# Altium PCB Power_supply_ver5.0.1.PcbDoc
Units mm, origin at the board's own origin, x right, y up, seen from the top; angles counter-clockwise.
Board outline 94.86 x 64.25 mm, 2 copper layers (Top Layer, Bottom Layer); 104 components, 45 nets, 301 pads, 37 vias.
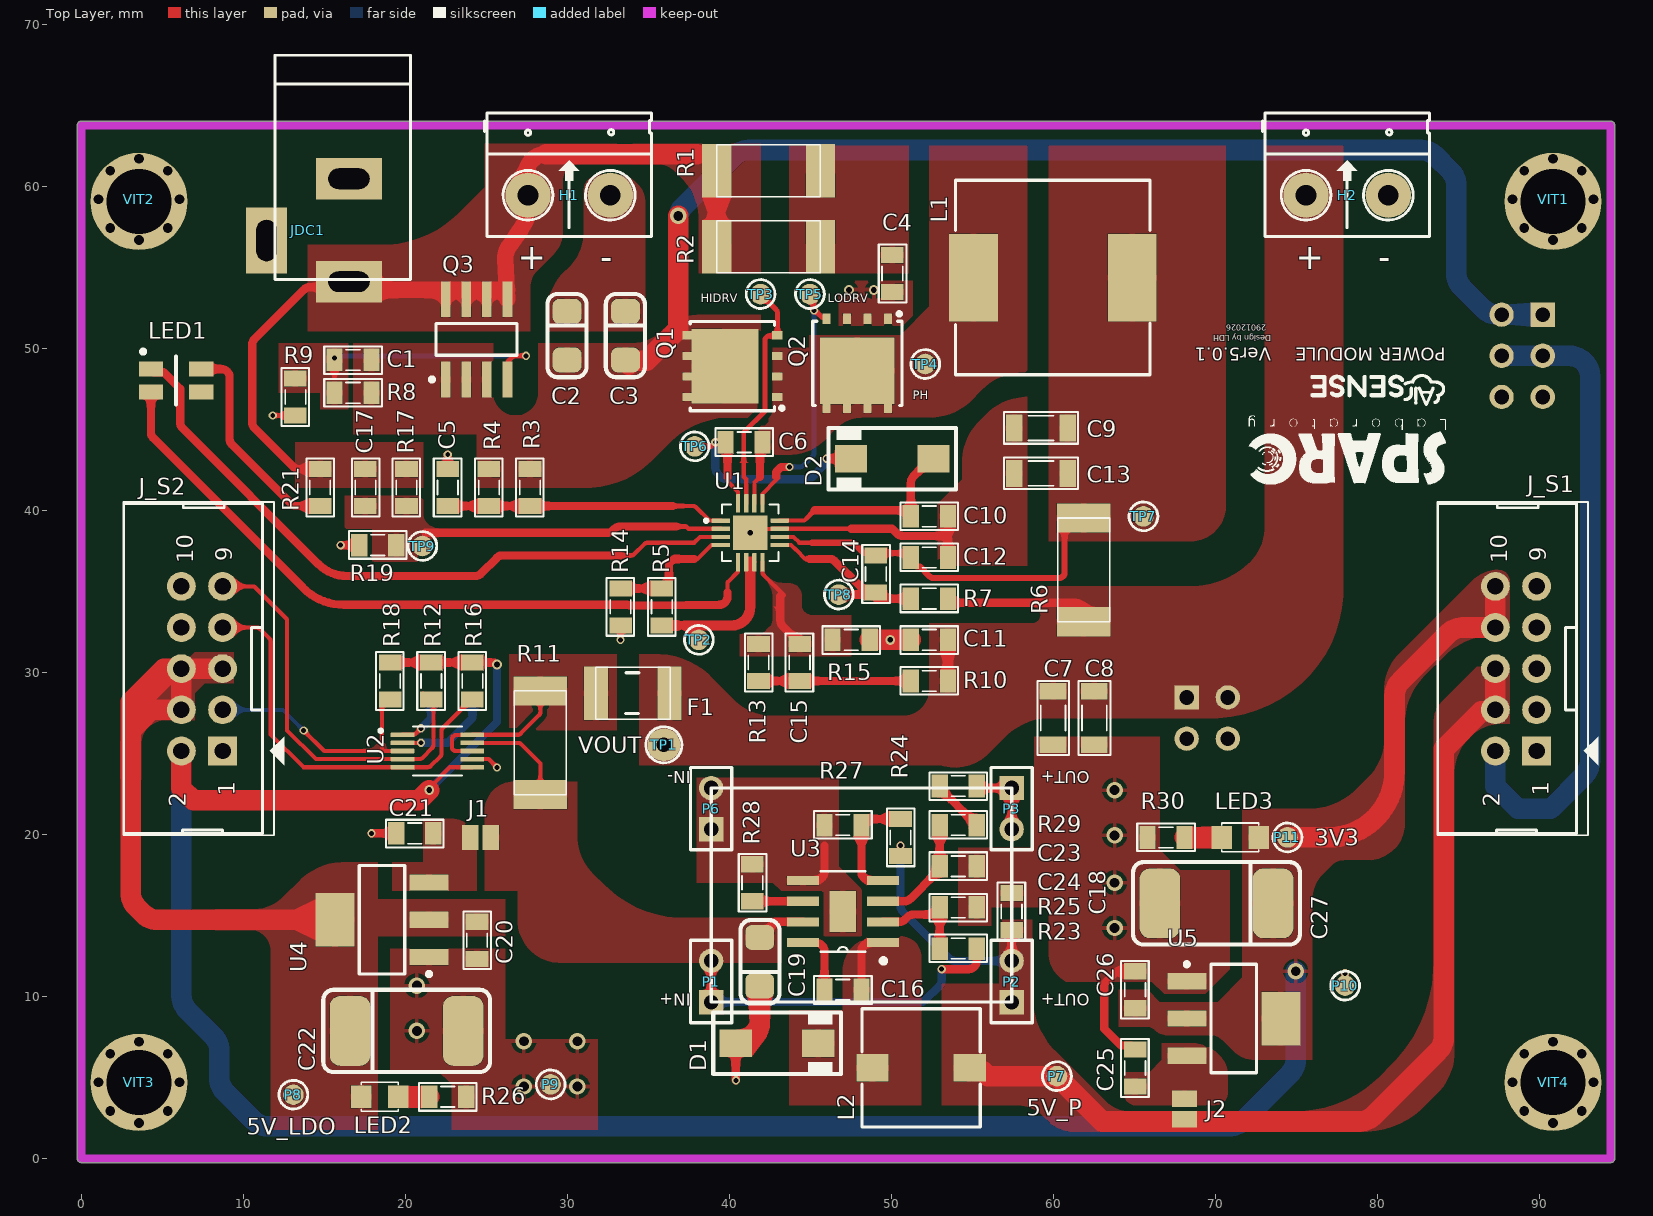
[diagram p0: Top Layer view]
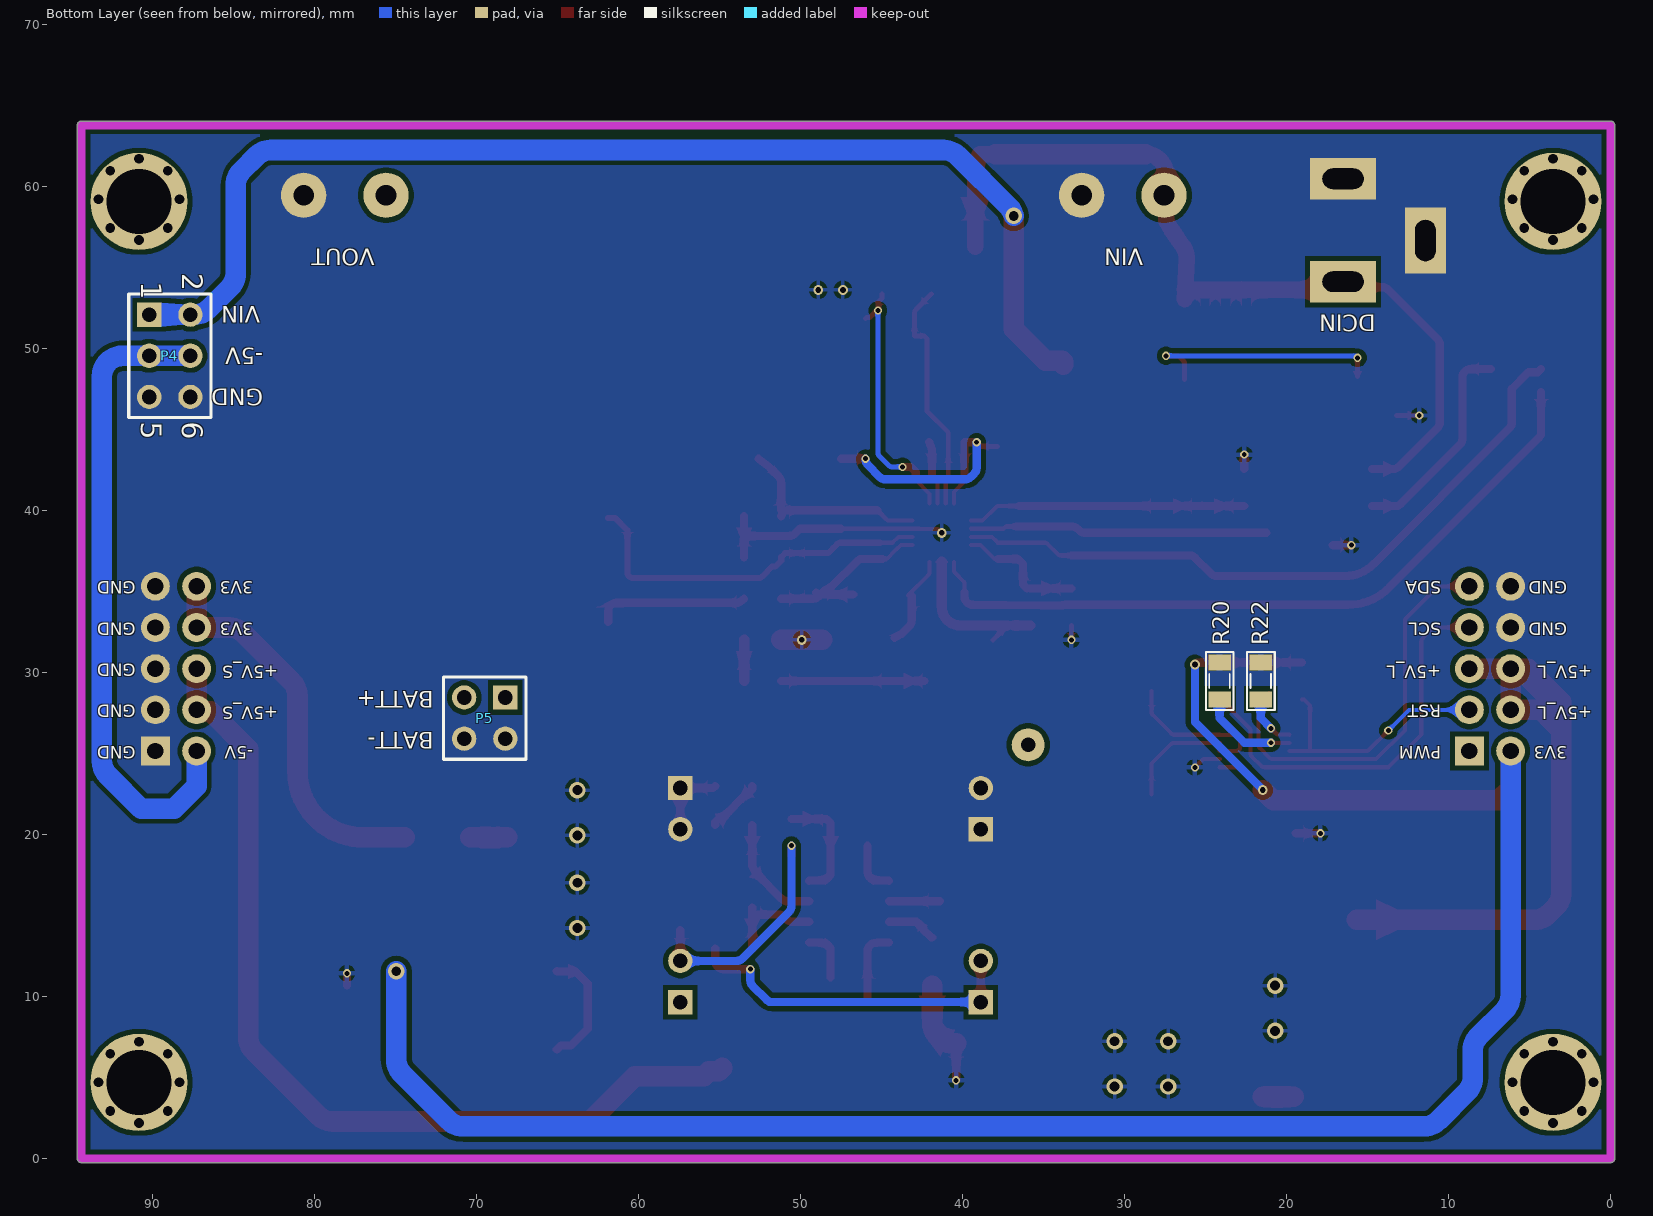
[diagram p1: Bottom Layer view, seen from below]
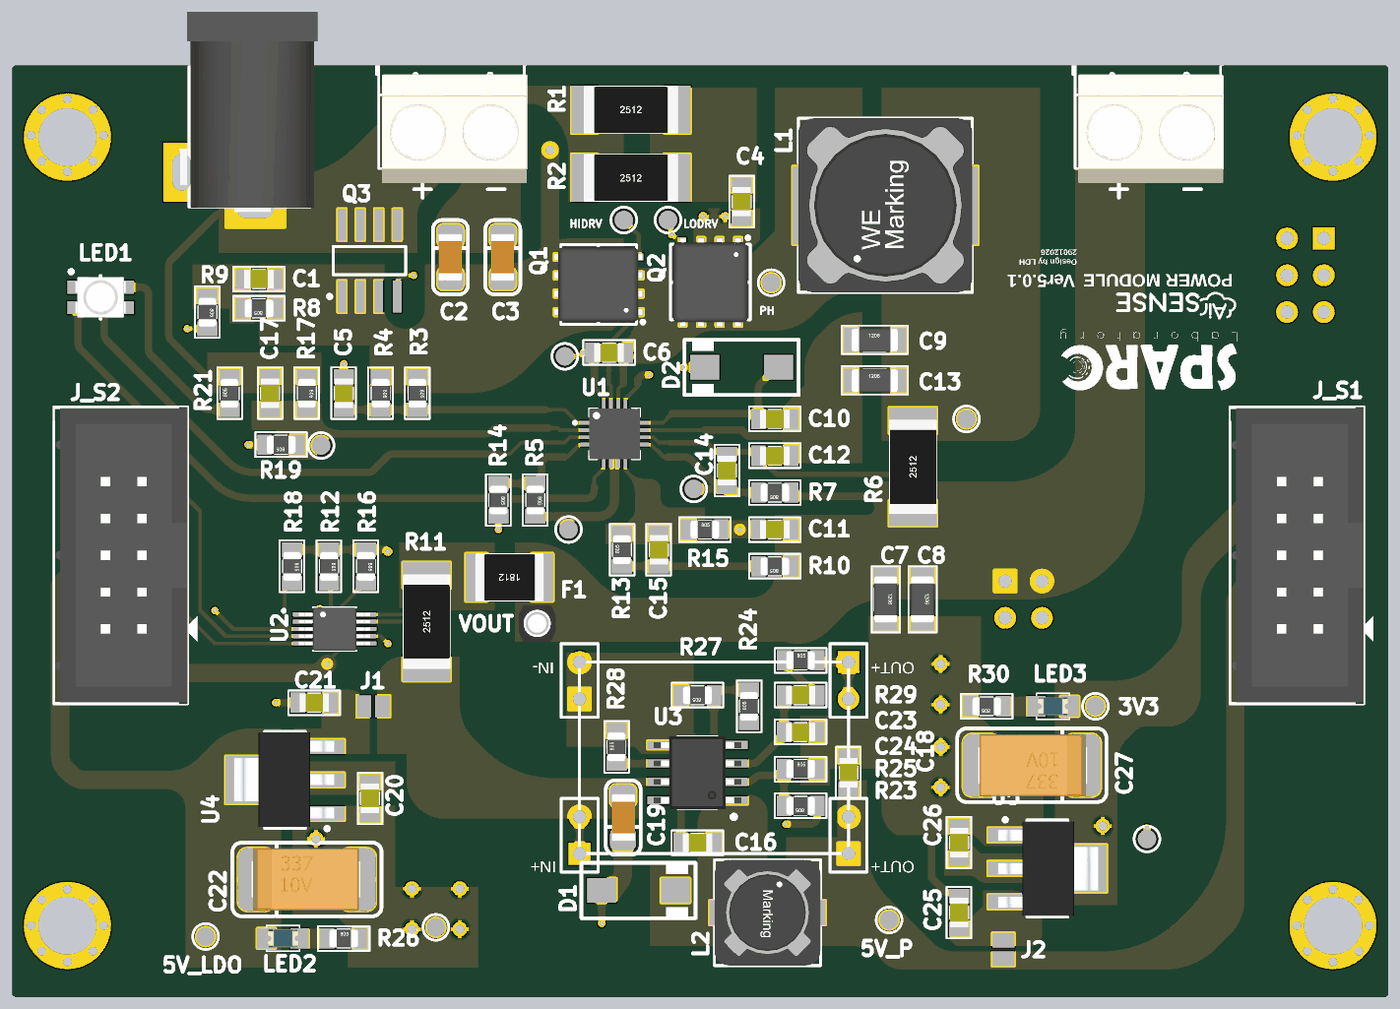
[diagram p2: 3D render of the assembled board from above, using the file's embedded part models]

## Layer stack, top to bottom
Top Solder: solder mask 0.0102, Solder Resist, Dk 3.5
Top Layer: signal copper 0.0356
Dielectric 1: dielectric 0.32, FR-4, Dk 4.8
Bottom Layer: signal copper 0.0356
Bottom Solder: solder mask 0.0102, Solder Resist, Dk 3.5

## Board outline
0,-0.25 cw(c0,0) -0.25,0.002 -0.25,0.003 -0.25,63.754 cw(c0,63.754) 0,64.004 94.361,64.004 cw(c94.361,63.754) 94.611,63.754 94.611,0 cw(c94.361,0) 94.361,-0.25

## Design rules (kind name [scope] priority, off if disabled: settings)
Clearance [All] p1: gap=0.305 ignorepadtopadclearanceinfootprint=FALSE except(0: Arc-Text Track-Text SMDPad-Text THPad-Text Via-Text Fill-Text Poly-Text Region-Text Text-Text; 0.076: SMDPad-SMDPad SMDPad-THPad; 0.127: Arc-Hole Track-Hole SMDPad-Hole THPad-Hole Via-Hole Fill-Hole Poly-Hole Region-Hole Text-Hole; 0.203: Arc-Arc Arc-Track Arc-SMDPad Arc-Via Track-Track Track-SMDPad Track-Via SMDPad-Via THPad-Via Via-Via)
HoleSize HoleSize_1 [All] p1: absolutevalues=TRUE maxlimit=25.4 minlimit=0.025 maxpercent=80.000 minpercent=20.000
HoleToHoleClearance [All] p1: gap=0.025 allowstackedmicrovias=TRUE
MinimumSolderMaskSliver [All] p1: minsoldermaskwidth=0
PlaneClearance [All] p1: clearance=0.381
PolygonConnect [All] p1: thpad.connectstyle=Direct thpad.reliefconductorwidth=0.254 thpad.reliefentries=4 thpad.polygonreliefangle="90 Angle" thpad.airgapwidth=0.254 smdpad.connectstyle=Relief smdpad.reliefconductorwidth=0.381 smdpad.reliefentries=4 smdpad.polygonreliefangle="90 Angle" smdpad.airgapwidth=0 via.connectstyle=Relief via.reliefconductorwidth=0.305 via.reliefentries=4 via.polygonreliefangle="90 Angle" via.airgapwidth=0.254
RoutingPriority [InNet('No Net')] p1: routingpriority=0
RoutingVias [All] p1: holewidth=0.508 width=0.508 viastyle="Through Hole" minholewidth=0.305 minwidth=0.508 maxholewidth=0.711 maxwidth=1.27
SMDToPlane [All] p1: distance=0
SilkToSilkClearance [All] p1: silktosilkclearance=0
SilkToSolderMaskClearance [IsPad] p1: minsilkscreentomaskgap=0 clearancetoexposedcopper=TRUE
SolderMaskExpansion [All] p1: expansion=0.102 istentingtop=FALSE
SupplyNets "Schematic Supply Nets_6" [InNet('TERM_EN')] p1: voltage=0.000
SupplyNets "Schematic Supply Nets_5" [InNet('3V3')] p2: voltage=0.000
SupplyNets "Schematic Supply Nets_4" [InNet('GND')] p3: voltage=0.000
SupplyNets "Schematic Supply Nets_2" [InNet('5V_PS')] p4: voltage=0.000
SupplyNets "Schematic Supply Nets_1" [InNet('-5V')] p5: voltage=0.000
SupplyNets "Schematic Supply Nets" [InNet('5V_LDO')] p6: voltage=0.000
UnRoutedNet [All] p1: checkbadconnections=TRUE
Width [All] p1: maxlimit=1.27 minlimit=0.254 preferedwidth=0.508
22 further rules are at their usual default settings.

## Components (designator, comment, footprint, x,y, rotation, side; value= is the part's Value field where it differs from the comment)
C1 "0.1uF" CAP_0805 16.764,49.276 r0 top value=33p
C2 "10uF 3216" CAP_3216 29.921,50.724 r270 top value=33p
C3 "10uF 3216" CAP_3216 33.528,50.724 r270 top value=33p
C4 "2.2uF" CAP_0805 50.038,54.61 r90 top value=33p
C5 "0.1uF" CAP_0805 22.606,41.402 r270 top value=33p
C6 "1uF" CAP_0805 40.894,44.196 r180 top value=33p
C7 "4.7uF" CAP_1206 59.96,27.186 r270 top value=33p
C8 "1uF" CAP_1206 62.5,27.186 r270 top value=33p
C9 "10uF" CAP_1206 59.212,45.069 r0 top value=33p
C10 "10uF" CAP_0805 52.324,39.624 r180 top value=33p
C11 "0.1uF" CAP_0805 52.324,32.004 r0 top value=33p
C12 "10uF" CAP_0805 52.324,37.084 r180 top value=33p
C13 "10uF" CAP_1206 59.212,42.275 r0 top value=33p
C14 "10uF" CAP_0805 49.022,36.068 r90 top value=33p
C15 "0.1uF" CAP_0805 44.323,30.607 r270 top value=33p
C16 "100nF" CAP_0805 46.99,10.414 r0 top value=33p
C17 "22pF" CAP_0805 17.526,41.402 r90 top value=33p
C18 "22uF 6.3V" CAP_0805 57.404,15.24 r270 top value=33p
C19 "10uF 50V" CAP_3216 41.91,12.192 r90 top value=33p
C20 "0.1uF" CAP_0805 24.413,13.462 r90 top value=33p
C21 "0.1uF" CAP_0805 20.574,20.066 r0 top value=33p
C22 "100uF" CAP_7343 20.006,7.874 r0 top
C23 "220pF" CAP_0805 54.102,20.574 r180 top value=33p
C24 "100nF" CAP_0805 54.102,18.034 r180 top value=33p
C25 "100nF" CAP_0805 65.024,5.588 r270 top value=33p
C26 "100nF" CAP_0805 65.024,10.414 r270 top value=33p
C27 "100uF" CAP_7343 70.104,15.748 r180 top
D1 "SS34-HF" SMA 42.926,7.112 r0 top value="Diode c?m 1N5408"
D2 "1N5819" SMA 50.034,43.18 r180 top value="Diode c?m 1N5408"
F1 "F1A" RES-SMD-1812 34.29,28.702 r180 top value=Fuse
H1 "Header 2" HED2 27.559,59.436 r0 top
H2 "Header 2" HED2 75.565,59.436 r0 top
J1 "Jumper2" JUMPER2 24.003,19.812 r180 top
J2 "Jumper2" JUMPER2 68.072,3.683 r90 top
J_S1 "SOURCE" IDC10 87.249,30.226 r90 top locked value="Header 5x2"
J_S2 "SOURCE_SIG" IDC10 6.172,30.226 r90 top locked value="Header 5x2"
JDC1 "Jac DC" DC-IN 13.97,57.277 r270 top
L1 "10uH" L-SMD-M-12x10 59.944,54.356 r90 top value="150 mH"
L2 "22uH" L-SMD-M-7.3x4.5 51.816,5.588 r90 top value="150 mH"
LED1 "LED RGB SMD v1" "LED RGB 3528" 5.842,48.006 r0 top
LED2 "LED" LED-0805-Blue 17.272,3.81 r0 top value="LED 3 ly Single Colour"
LED3 "LED" LED-0805-Blue 72.644,19.812 r180 top value="LED 3 ly Single Colour"
P1 "Header 2" HDR1X2 38.862,9.652 r90 top
P2 "Header 2" HDR1X2 57.404,9.652 r90 top
P3 "Header 2" HDR1X2 57.404,22.86 r270 top
P4 "Header 3X2" HDR2X3 90.17,52.07 r270 bottom
P5 "Header 2X2" HDR2X2 68.199,28.448 r0 bottom
P6 "Header 2" HDR1X2 38.862,20.32 r90 top
P7 "5V_P" "Testpoint 50ml" 60.198,5.08 r0 top value="Test Point"
P8 "5V_LDO" "Testpoint 50ml" 13.081,3.937 r90 top value="Test Point"
P9 "GND" "Testpoint 50ml" 28.956,4.572 r0 top value="Test Point"
P10 "GND" "Testpoint 50ml" 77.978,10.668 r0 top value="Test Point"
P11 "3V3" "Testpoint 50ml" 74.422,19.812 r0 top value="Test Point"
Q1 "AON6508" MOSFET_HP_8Pin 40.176,48.895 r180 top
Q2 "AON6508" MOSFET_HP_8Pin 47.879,49.066 r270 top
Q3 "AO4407A" SOIC-8 24.384,50.546 r90 top
R1 "2R" RES-SMD-2512 42.402,60.825 r0 top
R2 "2R" RES-SMD-2512 42.402,56.126 r0 top
R3 "10R" RES-SMD-0805 27.686,41.402 r270 top
R4 "NC" RES-SMD-0805 25.146,41.402 r270 top
R5 "10k" RES-SMD-0805 35.814,34.036 r270 top
R6 "0.05" RES-SMD-2512 61.976,36.322 r90 top
R7 "0R" RES-SMD-0805 52.324,34.544 r180 top
R8 "10R" RES-SMD-0805 16.764,47.244 r180 top
R9 "10R" RES-SMD-0805 13.208,46.99 r270 top
R10 "0R" RES-SMD-0805 52.324,29.464 r180 top
R11 "0.05R" RES-SMD-2512 28.448,25.654 r90 top
R12 "10k" RES-SMD-0805 21.59,29.464 r270 top
R13 "499k" RES-SMD-0805 41.783,30.607 r90 top
R14 "10k" RES-SMD-0805 33.274,34.036 r270 top
R15 "100k" RES-SMD-0805 47.498,32.004 r0 top
R16 "10k" RES-SMD-0805 24.13,29.464 r270 top
R17 "249k" RES-SMD-0805 20.066,41.402 r270 top
R18 "10k" RES-SMD-0805 19.05,29.464 r270 top
R19 "36k" RES-SMD-0805 18.288,37.846 r180 top
R20 "10k" RES-SMD-0805 24.13,29.464 r90 bottom
R21 "1k" RES-SMD-0805 14.732,41.402 r90 top
R22 "10k" RES-SMD-0805 21.59,29.464 r90 bottom
R23 "100k" RES-SMD-0805 54.102,12.954 r180 top
R24 "249k" RES-SMD-0805 50.546,19.812 r90 top
R25 "24.9k" RES-SMD-0805 54.102,15.494 r0 top
R26 "200R" RES-SMD-0805 22.606,3.81 r0 top
R27 "47k" RES-SMD-0805 46.99,20.574 r180 top
R28 "200k" RES-SMD-0805 41.402,17.018 r90 top
R29 "100k" RES-SMD-0805 54.102,22.987 r0 top
R30 "200R" RES-SMD-0805 66.929,19.812 r180 top
TP1 "VOUT" TP1 35.941,25.527 r0 top value="Test Point"
TP2 "TP" "Testpoint 50ml" 38.1,32.004 r0 top value="Test Point"
TP3 "HIDRV" "Testpoint 50ml" 41.91,53.34 r90 top value="Test Point"
TP4 "PH" "Testpoint 50ml" 52.07,49.022 r90 top value="Test Point"
TP5 "LODRV" "Testpoint 50ml" 44.958,53.34 r90 top value="Test Point"
TP6 "TP" "Testpoint 50ml" 37.846,43.942 r90 top value="Test Point"
TP7 "TP" "Testpoint 50ml" 65.532,39.624 r90 top value="Test Point"
TP8 "TP" "Testpoint 50ml" 46.736,34.798 r90 top value="Test Point"
TP9 "TP" "Testpoint 50ml" 21.043,37.794 r90 top value="Test Point"
U1 "BQ24650" VQFN-16 41.275,38.608 r0 top
U2 "INA226" VSSOP-10 21.971,25.146 r0 top
U3 "MP1584" SOP8-PP 46.99,15.24 r180 top
U4 "LM1117" SOT-223 18.553,14.732 r90 top
U5 "LM1117" SOT-223 71.109,8.636 r270 top
VIT1 "1" "Screw Hole 4mm"#1 90.805,59.182 r0 top locked net-tie
VIT2 "1" "Screw Hole 4mm"#1 3.556,59.182 r0 top locked net-tie
VIT3 "1" "Screw Hole 4mm"#2 3.556,4.699 r0 top locked net-tie
VIT4 "1" "Screw Hole 4mm"#2 90.805,4.699 r0 top locked net-tie

## Footprints (in the part's own frame and the unit in brackets; to place one, negate y for a bottom-side part, rotate by r counter-clockwise, add the part's x,y. Pads: shape width x height; smd on the part's side, far side on the other; paste and mask are expansions set on the pad)
CAP_0805 [mil]
  rect 39.37x55 smd: 1(-45,0) 2(45,0)
  silkscreen extent -70,-34 70,33, body extent -40,-25 40,25, height 24
CAP_1206 [mil]
  rect 40x65 smd: 1(-65,0) 2(65,0)
  silkscreen extent -90,-38 90,39, body extent -63,-31 63,32, height 40
CAP_3216 [mil]
  rrect50% 60x70 smd: 1(-60.99,2) 2(56.99,2)
  silkscreen extent -103,-46 99,49, body extent -65,-30 61,32, height 39
CAP_7343 [mm] "Capacitor Tantalum 7343"
  rrect50% 2.5x4.3 smd: 1(-3.429,0) 2(3.556,0)
  silkscreen extent -5.08,-2.54 5.21,2.54, body extent -3.75,-2.14 3.75,2.16, height 2.8
DC-IN [mil] "Jac DC input"
  rect 100x160 hole 50 slot 100 at 90 deg: 1(125,100) 2(-125,100)
  rect 160x100 hole 50 slot 100 at 0 deg: 3(25,-100)
  silkscreen extent -425,-80 120,250, body extent -410,-105 134,269, height 434
HDR1X2 [mm] "Connector; Header; 2 Position"
  rect 1.5x1.5 hole 0.9: 1(0,0)
  round 1.5 hole 0.9: 2(2.54,0)
  silkscreen extent -1.27,-1.27 3.81,1.27, body extent -1.27,-1.27 3.81,1.27, height 7
HDR2X2 [mm] "Connector; Header; 2x2 Position"
  rect 1.5x1.5 hole 0.9: 1(0,0)
  round 1.5 hole 0.9: 2(0,2.54) 3(2.54,0) 4(2.54,2.54)
  silkscreen extent -1.27,-1.27 3.81,3.81, body extent -1.27,-1.27 3.81,3.81, height 7
HDR2X3 [mm] "Connector; Header; 3x2 Position"
  rect 1.5x1.5 hole 0.9: 1(0,0)
  round 1.5 hole 0.9: 2(0,2.54) 3(2.54,0) 4(2.54,2.54) 5(5.08,0) 6(5.08,2.54)
  silkscreen extent -1.27,-1.27 6.35,3.81, body extent -1.27,-1.27 6.35,3.81, height 7
HED2 [mil] "Header 2, 2 pin, hight 300mil, Pin to Pin 200, Colour Green"
  round 110 hole 50: 1(0,0) 2(200,0)
  silkscreen extent -106,-100 300,200, body extent -92,-140 302,155, height 394
IDC10 [mil]
  rect 70x70 hole 40: 1(-200,-100)
  round 70 hole 40: 2(-200,0) 3(-100,-100) 4(-100,0) 5(0,-100) 6(0,0) 7(100,-100) 8(100,0) 9(200,-100) 10(200,0)
  silkscreen extent -405,-250 405,141, body extent -400,-223 400,135, height 366
JUMPER2 [mil]
  rect 40x60 smd: 1(-50,0) 2(0,0)
L-SMD-M-7.3x4.5 [mm] "WE-PDA SMD Shielded Power Inductor, 7345"
  rect 1.7x2 smd: 1(0,3) 2(0,-3)
  silkscreen extent -3.65,-3.65 3.65,3.65, body extent -3.65,-3.65 3.65,3.65, height 4.05
L-SMD-M-12x10 [mm] "WE-PDA SMD Shielded Power Inductor, 1210"
  rect 5.4x3 smd: 1(0,4.9) 2(0,-4.9)
  silkscreen extent -6,-6 6,6, body extent -6,-6 6,6, height 9.7
"LED RGB 3528" [mm]
  rect 1.5x0.9 smd: 1(1.55,0.707) 2(1.55,-0.71) 3(-1.55,0.707) 4(-1.55,-0.707)
  silkscreen extent -2.15,-1.5 0.03,1.9, body extent -1.75,-1.4 1.75,1.4, height 1.87
LED-0805-Blue [mil]
  rect 50x55 smd: 1(0,0) 2(90,0)
  silkscreen extent 0,-35 90,35, body extent 5,-25 85,25, height 43
MOSFET_HP_8Pin [mm]
  rect 0.65x0.5 smd: 1(-2.75,1.905) 2(-2.75,0.635) 3(-2.75,-0.635) 4(-2.75,-1.905)
  rect 0.55x0.5 smd: 5(2.795,-1.905) 6(2.795,-0.635) 7(2.795,0.635) 8(2.795,1.905)
  rect 4.12x4.6 smd: 9(0.46,0)
  silkscreen extent -3.13,-2.75 2.6,2.75, body extent -3,-2.75 3.05,2.75, height 0.95
RES-SMD-0805 [mil]
  rect 39.37x55 smd: 1(-45,0) 2(45,0)
  silkscreen extent -70,-34 70,33, body extent -39,-25 39,25, height 31
RES-SMD-1812 [mm] "Chip Capacitor, Body 3.2x2.5mm, IPC Medium Density"
  rect 1.5x3.3 smd: 1(-1.996,0) 2(2.54,0)
  silkscreen extent -2.04,-1.6 2.54,1.6, body extent -2,-1.6 2.5,1.6, height 0.6
RES-SMD-2512 [mm] "Chip Capacitor, Body 3.2x2.5mm, IPC Medium Density"
  rect 1.8x3.3 smd: 1(-3.2,0.127) 2(3.2,0.127)
  silkscreen extent -3.2,-1.47 3.2,1.73, body extent -3.2,-1.47 3.2,1.73, height 0.6
"Screw Hole 4mm"#1 [mm]
  round 0.6 hole 0.6: 1(-2.5,0) 1(-1.768,-1.768) 1(-1.768,1.768) 1(0,-2.5) 1(0,2.5) 1(1.768,-1.768) 1(1.768,1.768) 1(2.5,0)
  round 6 hole 4: 1(0,-0.127)
"Screw Hole 4mm"#2 [mm]
  round 0.6 hole 0.6: 1(-2.5,0) 1(-1.768,-1.768) 1(-1.768,1.768) 1(0,-2.5) 1(0,2.5) 1(1.768,-1.768) 1(1.768,1.768) 1(2.5,0)
  round 6 hole 4: 1(0,0)
SMA [mm]
  rect 2x1.7 smd: 1(-2.544,0) 2(2.544,0)
  silkscreen extent -3.94,-1.9 3.94,1.91, body extent -2.87,-1.4 2.87,1.4, height 2.29
SOIC-8 [mm] "SOIC, 8-Leads, Body 5,0x4,0mm (max), Pitch 1,27mm, IPC Medium Density"
  rect 2.2x0.6 smd: 1(-2.475,1.905) 2(-2.475,0.635) 3(-2.475,-0.635) 4(-2.475,-1.905) 5(2.475,-1.905) 6(2.475,-0.635) 7(2.475,0.635) 8(2.475,1.905)
  silkscreen extent -2.6,-2.5 0.98,2.88, body extent -3.2,-2.5 3.2,2.5, height 1.75
SOP8-PP [mil]
  rect 78x22 smd: 1(-96.99,75.01) 2(-96.99,25.01) 3(-96.99,-24.99) 4(-96.99,-74.99) 5(97.01,-74.99) 6(97.01,-24.99) 7(97.01,25.01) 8(97.01,75.01)
  rect 64x100 smd: 9(0,0)
  silkscreen extent -100,-98 54,121, body extent -119,-99 119,99, height 63
SOT-223 [mm] "SOT223, 4-Leads, Body 6.5x3.5mm, Pitch 2.3mm, Lead Span 7mm, IPC Medium Density"
  rect 1x2.4 smd: 1(-2.3,-2.9) 2(0,-2.9) 3(2.3,-2.9)
  rect 3.3x2.4 smd: 2(0,2.9)
  silkscreen extent -3.47,-3.03 3.35,1.4, body extent -3.23,-3.39 3.27,3.5, height 1.72
"Testpoint 50ml" [mm]
  round 1.27 smd: 1(0,0)
  silkscreen extent -0.89,-0.89 0.89,0.89
TP1 [mil] "Test point"
  round 80 hole 35: 1(0,0)
  silkscreen extent -44,-44 44,44, body extent -50,-50 50,50, height 178
VQFN-16 [mm]
  rrect25% 1.143x0.26 smd: 1(-1.812,0.75) 2(-1.812,0.25) 3(-1.812,-0.25) 4(-1.812,-0.75) 9(1.812,-0.75) 10(1.812,-0.25) 11(1.812,0.25) 12(1.812,0.75)
  rrect25% 0.26x1.143 smd: 5(-0.75,-1.812) 6(-0.25,-1.812) 7(0.25,-1.812) 8(0.75,-1.812) 13(0.75,1.812) 14(0.25,1.812) 15(-0.25,1.812) 16(-0.75,1.812)
  rect 2.14x2.14 smd paste-0.39: 17(0,0)
  silkscreen extent -2.82,-1.75 1.75,1.75, body extent -1.75,-1.75 1.75,1.75, height 1
VSSOP-10 [mm]
  rrect25% 1.47x0.28 smd: 1(-2.15,1) 2(-2.15,0.5) 3(-2.15,0) 4(-2.15,-0.5) 5(-2.15,-1) 6(2.15,-1) 7(2.15,-0.5) 8(2.15,0) 9(2.15,0.5) 10(2.15,1)
  silkscreen extent -3.6,-1.5 1.5,1.5, body extent -2.46,-1.5 2.46,1.5, height 1.1

## Part data
C1 C2 C3 C4 C5 C6 C7 C8 C9 C10 C11 C12 C13 C14 C15 C17: library part CapSMD, "Capacitor", LatestRevisionDate=17-Jul-2002, LatestRevisionNote="Re-released for DXP Platform.", PackageReference=RAD-0.3, Published=8-Jun-2000, Publisher="Altium Limited"
C16 C18 C20 C21 C23 C24 C25 C26: library part CapSMD, "C 0805", LatestRevisionDate=17-Jul-2002, LatestRevisionNote="Re-released for DXP Platform.", PackageReference=RAD-0.3, Published=8-Jun-2000, Publisher="Altium Limited"
C19: library part CapSMD, "C 1206", LatestRevisionDate=17-Jul-2002, LatestRevisionNote="Re-released for DXP Platform.", PackageReference=RAD-0.3, Published=8-Jun-2000, Publisher="Altium Limited"
C22 C27: library part CAP_TAN_SMD, "C Tan 7343"
D1 D2: library part 1N5822, "Schottky Rectifiers"
F1: library part Fuse, "Fuse 5A", Designed by=VanDungEvn
H1 H2: library part Hed2, "Header 2 (Green)"
J1 J2: "Jumper, 2-Pin"
J_S1 J_S2: library part "IDC 5X2"
JDC1: library part DCIN, "Jac DC input"
L1: library part Inductor, "Inductor"
L2: library part Inductor, "6.8-10uH"
LED2 LED3: "LED Single colour Green and Red"
P1 P2 P3 P6: "Header, 2-Pin", LatestRevisionDate=17-Jul-2002, LatestRevisionNote="Re-released for DXP Platform.", Publisher="Altium Limited"
P4: "Header, 3-Pin, Dual row", LatestRevisionDate=17-Jul-2002, LatestRevisionNote="Re-released for DXP Platform.", Publisher="Altium Limited"
P5: "Header, 2-Pin, Dual row", LatestRevisionDate=17-Jul-2002, LatestRevisionNote="Re-released for DXP Platform.", Publisher="Altium Limited"
P7 P8 P9 P10 P11 TP2 TP3 TP4 TP5 TP6 TP7 TP8 TP9: library part TP_1, "Test Point"
Q1 Q2: library part MOSFET-N, "MFET-CHP"
Q3: library part MOSFET-P, "MFET-ChP", componentlink1description="New link", ComponentLink1URL=https://linhkien.cxtvn.com/3834-ru20p7c-mosfet-p-ch-5a-20v-sot-23.html
R1 R2 R6: library part "Resistor - SMD", "Resistor - SMD 2512", Manufacturer="Generic Components", Class=Passive, Published=08/06/2000, Publisher="Altium Hobart Technology Centre"
R3 R4 R5 R7 R10 R13 R14 R15 R17 R19 R21: library part "Resistor - SMD", "Resistor - SMD 0805", Manufacturer="Generic Components", Class=Passive, Published=08/06/2000, Publisher="Altium Hobart Technology Centre"
R8 R9 R12 R16 R18 R20 R22 R23 R26 R28 R29 R30: library part "Resistor - SMD", "R 0805", Manufacturer="Generic Components", Class=Passive, Published=08/06/2000, Publisher="Altium Hobart Technology Centre"
R11: library part "Resistor - SMD", "R 2512 1%", Manufacturer="Generic Components", Class=Passive, Published=08/06/2000, Publisher="Altium Hobart Technology Centre"
R24 R25 R27: library part "Resistor - SMD", "R 0805 1%", Manufacturer="Generic Components", Class=Passive, Published=08/06/2000, Publisher="Altium Hobart Technology Centre"
TP1: library part TP1, "Test Point"
U1: "BQ24650 Stand-Alone Synchronous Buck Battery Charge Controller for Solar Power / With Maximum Power Point Tracking"
U2: "Current Sensing IC"
U3: "MP1584, The wide 4.5V to 28V input range accommodates a   variety   of   step-down   applications, SOIC8E"
U4 U5: "3V3 5V LDO, AMS1117, LDI1117", Creator="Nguyen Ba Bien", Website=http://group3i.net
VIT1 VIT2 VIT3 VIT4: library part VIT, "Oc Vit"

## Via types
v1: diameter 0.508, hole 0.305, Top Layer to Bottom Layer, 19 vias
v2: diameter 1.016, hole 0.61, Top Layer to Bottom Layer, 12 vias
v3: diameter 0.61, hole 0.356, Top Layer to Bottom Layer, 6 vias

## Nets (pads, with @x,y where several pads share a name; then routed paths per layer and width w, separated by ;. In a path a pad name is that pad's centre, name@x,y a point inside that pad or via, vN(x,y) a via of type N, cw(c..) or ccw(c..) an arc to the next point about the centre after c; other vN are vias at no path point)
3V3: C26.2 C27.1 J_S1.8 J_S1.10 J_S2.2 LED3.1 P11.1 R12.1 R16.1 R18.1 U2.6 U5.2 | length 158.2
  Top Layer w0.254: v3(21.463,22.733) 21.463,22.829 21.63,22.997 21.63,23.027 22.749,24.146 U2.6
  Top Layer w0.508: R18.1 25.499,30.607 25.627,30.48 v3(25.654,30.48)
  Top Layer w1.27: J_S2.2 6.172,22.842 6.916,22.098 20.828,22.098 v3(21.463,22.733) ; P11.1 76.962,19.812 ccw(c76.962,23.876) 81.026,23.876 81.026,28.557 cw(c82.296,28.557) 81.398,29.455 84.338,32.395 cw(c85.235,31.496) 85.235,32.766 J_S1.8 J_S1.10
  Bottom Layer w0.508: v3(21.463,22.733) 25.654,26.924 v3(25.654,30.48)
  Bottom Layer w1.27: J_S2.2 6.172,10.051 ccw(c7.442,10.051) 6.538,9.159 ccw(c7.442,10.051) 6.542,9.155 8.139,7.558 cw(c7.239,6.662) 8.509,6.662 8.509,4.996 ccw(c9.779,4.996) 8.88,4.1 10.628,2.352 ccw(c11.524,3.251) 11.524,1.981 70.797,1.981 ccw(c70.797,3.251) 71.694,2.352 74.559,5.217 ccw(c73.66,6.114) 74.93,6.114 v2(74.93,11.557)
5V_LDO: C20.2 C22.1 J_S2.4 J_S2.5 J_S2.6 LED2.1 P8.1 U4.2 | length 43.5
  Top Layer w0.508: 3.589,26.957 3.589,27.643 J_S2.6 5.932,29.986 5.094,29.986
  Top Layer w1.27: J_S2.5 J_S2.6 ; U4.2@15.653,14.732 4.717,14.732 cw(c4.717,16.002) 3.82,15.103 3.419,15.504 cw(c4.318,16.401) 3.048,16.401 3.048,26.412 cw(c4.318,26.41) 3.048,26.416 ; 3.048,26.416 3.048,28.18 5.094,30.226 J_S2.6 ; 3.048,26.416 3.589,26.957 4.318,27.686 J_S2.4 J_S2.6
5V_PS: C18.2 J2.1 J_S1.4 J_S1.6 L2.2 P2.1 P2.2 P7.1 R24.1 | length 71.7
  Top Layer w0.508: R24.1 v1(50.546,19.304) ; P2.2 C18.2
  Top Layer w1.27: L2.2 55.031,5.373 55.632,5.373 55.925,5.08 P7.1 ; P7.1@60.462,4.816 62.992,2.286 68.072,2.286 78.849,2.286 ccw(c78.849,3.556) 79.746,2.657 83.703,6.614 ccw(c82.804,7.511) 84.074,7.511 84.074,10.423 84.074,25.273 86.39,27.589 87.152,27.589 J_S1.4 J_S1.6
  Bottom Layer w0.508: v1(50.546,19.304) 50.546,15.577 ccw(c51.054,15.577) 50.648,15.273 ccw(c51.054,15.577) 50.694,15.219 53.573,12.34 ccw(c53.931,12.7) 53.627,12.294 ccw(c53.931,12.7) 53.931,12.192 P2.2
-5V: J_S1.2 P4.3 P4.4 | length 40
  Bottom Layer w1.27: J_S1.2 87.249,22.987 88.646,21.59 90.678,21.59 92.719,23.631 ccw(c91.821,24.529) 93.091,24.529 93.091,48.26 ccw(c91.821,48.26) 91.821,49.53 P4.4
BTST: C6.2 D2.2 TP6.1 U1.16 | length 17.1
  Top Layer w0.254: 39.872,42.053 39.872,41.789 40.525,41.136 U1.16
  Top Layer w0.305: TP6.1 38.844,43.942 39.098,44.196 v1(39.116,44.196)
  Top Layer w0.508: v1(39.116,44.196) C6.2@39.832,44.196 ; 39.872,42.053 C6.2@39.872,44.196 ; v1(45.974,43.18) D2.2
  Bottom Layer w0.508: v1(39.116,44.196) 39.116,42.628 ccw(c39.624,42.628) 39.264,42.27 39.476,42.058 ccw(c39.834,42.418) 39.834,41.91 44.748,41.91 ccw(c44.748,42.418) 45.052,42.012 ccw(c44.748,42.418) 45.106,42.058 45.826,42.778 ccw(c45.466,43.136) 45.974,43.136 v1(45.974,43.18)
GND: C2.1 C3.1 C4.1 C5.1 C7.2 C8.2 C9.1 C10.1 C11.1 C12.1 C13.1 C18.1 C19.1 C20.1 C21.1 C22.2 C24.1 C25.1 C26.1 C27.2 D1.1 H1.2 H2.2 J_S1.1 J_S1.3 J_S1.5 J_S1.7 J_S1.9 J_S2.8 J_S2.10 JDC1.2 JDC1.3 P3.1 P3.2 P4.5 P4.6 P5.2 P5.4 P6.1 P6.2 P9.1 P10.1 Q2.1 Q2.2 Q2.3 R9.2 R14.2 R15.2 R19.2 R20.2 R22.2 R25.2 R26.2 R27.2 R28.2 R29.2 R30.2 U1.11 U1.17 U2.7 U3.5 U3.9 U4.1 U5.1 | length 48.1
  Top Layer w0.254: U2.7 25.138,24.646 v1(25.654,24.13) ; v3(41.275,38.608) 41.518,38.851 42.639,38.851 42.646,38.858 U1.11 47.494,38.858 47.498,38.862
  Top Layer w0.305: v1(11.811,45.847) R9.2 ; v1(33.274,32.004) R14.2
  Top Layer w0.508: v1(16.002,37.846) R19.2 ; v1(17.907,20.066) C21.1 ; C5.1 v1(22.606,43.434) ; D1.1 40.382,4.83 v1(40.386,4.826) ; U3.5 45.263,17.17 45.339,17.17 ccw(c45.339,17.678) 45.847,17.678 45.847,19.304 ; 47.498,38.862 50.026,38.862 50.322,38.566 50.323,38.565 ccw(c50.681,38.926) 50.376,38.519 ccw(c50.681,38.925) 50.681,38.417 53.467,38.417 ; C12.1 53.467,38.417 ; C10.1 53.467,38.417 ; R29.2 55.372,22.86 P3.1 P3.2 ; C25.1 64.778,6.977 64.143,6.977 63.119,8.001 63.119,10.795 63.861,11.537 65.004,11.537 C26.1 ; P10.1 v1(77.978,11.43)
  Top Layer w1.27: D1.1 40.747,7.122 ccw(c40.589,8.382) 41.859,8.382 C19.1 ; R15.2 v3(49.911,32.004) C11.1
  other v2: 27.305,4.445 30.607,4.445 27.305,7.239 30.607,7.239 20.701,7.874 20.701,10.668 63.754,14.224 63.754,17.018 63.754,19.939 63.754,22.733
  other v3: 47.371,53.594 48.895,53.594
HIDRV: Q1.4 TP3.1 U1.15 | length 14.6
  Top Layer w0.254: 40.872,42.053 41.025,41.9 U1.15
  Top Layer w0.305: 40.872,42.053 40.872,44.805 42.182,46.115 42.182,50.575 42.361,50.753 42.954,50.753 42.954,52.17 ccw(c42.649,52.17) 42.865,52.385 TP3.1
I2CSW_SCL: J_S2.7 R16.2 U2.5 | length 25.1
  Top Layer w0.254: J_S2.7 10.817,32.766 cw(c10.817,32.512) 10.969,32.715 cw(c10.817,32.512) 10.996,32.692 11.61,32.078 cw(c11.43,31.899) 11.633,32.051 cw(c11.43,31.899) 11.684,31.899 11.684,26.162 13.7,24.146 U2.5 21.374,24.146 ccw(c21.374,24.4) 21.526,24.197 ccw(c21.374,24.4) 21.553,24.22 22.151,24.818 ccw(c21.971,24.997) 22.174,24.845 ccw(c21.971,24.997) 22.225,24.997 22.225,26.382 cw(c22.479,26.382) 22.276,26.535 cw(c22.479,26.382) 22.299,26.561 24.059,28.321 R16.2@24.257,28.321
I2CSW_SDA: J_S2.9 R12.2 U2.4 | length 25.3
  Top Layer w0.254: J_S2.9 10.668,35.306 12.7,33.274 12.7,26.416 14.47,24.646 U2.4 20.858,24.646 ccw(c20.858,24.9) 21.037,24.72 21.643,25.326 ccw(c21.463,25.505) 21.666,25.353 ccw(c21.463,25.505) 21.717,25.505 R12.2@21.717,28.321
  Top Layer w0.381: R12.2@21.082,28.631 21.392,28.321 R12.2
LODRV: Q2.4 TP5.1 U1.13 | length 16
  Top Layer w0.254: U1.13 42.028,40.423 42.028,41.012 42.872,41.856 42.872,42.053
  Top Layer w0.305: TP5.1 44.958,53.079 45.173,52.864 45.173,52.363 v1(45.212,52.324) 45.287,52.324 45.72,51.891 45.899,51.891 Q2.4
  Top Layer w0.508: 42.872,42.053 42.872,42.351 43.183,42.662 43.481,42.662 43.491,42.672 v1(43.688,42.672)
  Bottom Layer w0.305: v1(43.688,42.672) 44.324,42.672 ccw(c44.324,42.977) 44.539,42.761 45.123,43.345 ccw(c44.907,43.56) 45.151,43.377 ccw(c44.907,43.56) 45.212,43.56 v1(45.212,52.324)
MPPSET: C17.1 R17.2 R19.1 TP9.1 U1.2 | length 18.4
  Top Layer w0.254: 36.703,38.997 37.33,38.997 37.469,38.858 U1.2
  Top Layer w0.508: 21.243,38.608 32.429,38.608 ccw(c32.429,39.116) 32.787,38.756 32.88,38.849 cw(c33.238,38.489) 33.238,38.997 36.703,38.997
NetC1_1: C1.1 Q3.4 R8.2 R9.1 | length 15.3
  Top Layer w0.305: 15.621,48.26 v1(15.621,49.403) ; Q3.4 26.289,49.023 cw(c26.594,49.023) 26.378,49.238 26.581,49.441 cw(c26.796,49.225) 26.796,49.53 v1(27.432,49.53)
  Bottom Layer w0.305: v1(15.621,49.403) 15.659,49.441 cw(c15.874,49.225) 15.874,49.53 v1(27.432,49.53)
NetC4_2: C4.2 R1.2 R2.2
NetC5_2: C5.2 R3.2 R4.2 U1.1 | length 17.2
  Top Layer w0.254: 36.484,40.259 37.741,40.259 cw(c37.741,40.005) 37.92,40.185 38.747,39.358 U1.1
  Top Layer w0.508: C5.2 R4.2 ; R4.2@25.209,40.281 25.59,40.262 25.642,40.26 ccw(c25.666,40.767) 25.666,40.259 R3.2 36.484,40.259
NetC10_2: C10.2 D2.1 U1.12 | length 12.2
  Top Layer w0.254: U1.12 44.607,39.358 45.246,39.997
  Top Layer w0.508: 45.246,39.997 45.563,39.997 C10.2@50.808,39.997 ; C10.2@51.008,39.992 C10.2 ; C10.2@51.181,39.997 51.181,41.67 cw(c51.816,41.67) 51.366,42.118 51.895,42.647 D2.1
NetC15_1: C15.1 R13.2 R15.1 U1.8 | length 5.6
  Top Layer w0.254: U1.8 42.028,36.351 42.029,36.179 ccw(c42.283,36.181) 42.103,36.002 43.351,34.754
  Top Layer w0.508: 43.126,34.687 43.126,33.213 ccw(c43.634,33.213) 43.274,32.854 43.752,32.377 C15.1@44.196,32.131
NetC15_2: C15.2 R10.2 R13.1 | length 8.8
  Top Layer w0.508: R13.1@42.336,29.464 R10.2
NetC16_1: C16.1 U3.8 | length 4.5
  Top Layer w0.508: U3.8 45.263,13.309 45.356,13.306 cw(c45.339,12.798) 45.847,12.798 C16.1@45.847,9.919
NetC16_2: C16.2 D1.2 L2.1 U3.1 | length 3.2
  Top Layer w0.508: 48.133,11.176 48.133,12.801 cw(c48.641,12.801) 48.641,13.309 48.717,13.309 U3.1
NetC21_2: C21.2 J1.2 U4.3
NetC23_1: C23.1 R29.1 | length 3.5
  Top Layer w0.508: R29.1 52.959,22.789 53.205,22.543 53.277,22.543 54.801,21.018 54.999,21.018 55.245,20.772 C23.1
NetC23_2: C23.2 C24.2 U3.3 | length 7
  Top Layer w0.508: U3.3 50.788,15.875 ccw(c50.788,16.383) 51.146,16.023 52.713,17.59 C24.2 C23.2
NetC25_2: C25.2 J2.2 U5.3
NetLED1_1: LED1.1 R21.1 | length 13.2
  Top Layer w0.508: LED1.1 8.636,48.713 cw(c8.636,48.205) 9.144,48.205 9.144,44.405 ccw(c9.652,44.406) 9.292,44.048 12.933,40.407 ccw(c13.291,40.767) 13.291,40.259 R21.1
NetLED1_3: LED1.3 U1.3 | length 42.6
  Top Layer w0.254: 33.274,37.211 33.931,37.211 ccw(c33.931,37.465) 34.083,37.262 ccw(c33.931,37.465) 34.11,37.285 34.748,37.923 cw(c34.927,37.743) 34.775,37.946 cw(c34.927,37.743) 34.927,37.997 37.816,37.997 38.177,38.358 U1.3
  Top Layer w0.508: LED1.3 4.488,48.517 5.077,48.517 6.096,47.498 6.096,45.421 ccw(c6.604,45.422) 6.244,45.064 14.647,36.661 ccw(c16.383,38.394) 16.383,35.941 24.301,35.941 ccw(c24.301,36.449) 24.605,36.043 ccw(c24.301,36.449) 24.66,36.09 25.632,37.062 cw(c25.991,36.703) 25.991,37.211 33.274,37.211
NetLED1_4: LED1.4 U1.5 | length 45.1
  Top Layer w0.254: 39.872,34.941 39.872,35.554 40.522,36.204 40.522,36.793 U1.5
  Top Layer w0.508: LED1.4 4.292,44.813 ccw(c4.8,44.813) 4.394,44.509 ccw(c4.8,44.813) 4.44,44.455 13.665,35.23 ccw(c16.188,37.68) 16.191,34.163 33.683,34.163 cw(c33.681,33.655) 33.817,34.144 ccw(c33.969,34.682) 33.969,34.123 35.119,34.123 ccw(c35.119,34.682) 35.124,34.123 39.363,34.163 ccw(c39.359,34.671) 39.866,34.66 39.872,34.941
NetLED2_2: LED2.2 R26.1 | length 1.9
  Top Layer w1.27: LED2.2 R26.1
NetLED3_2: LED3.2 R30.1 | length 2.3
  Top Layer w1.27: R30.1 LED3.2
NetR5_1: R5.1 R14.1 U1.4 | length 7.8
  Top Layer w0.254: 37.816,36.997 38.013,36.997 38.871,37.855 39.46,37.855 U1.4
  Top Layer w0.508: R14.1 R5.1 ; R5.1@36.012,35.179 36.258,35.425 36.258,36.699 36.556,36.997 37.816,36.997
NetR20_1: R20.1 U2.2 | length 6.1
  Top Layer w0.254: U2.2 20.947,25.646 v1(20.955,25.654)
  Bottom Layer w0.508: v1(20.955,25.654) 22.606,25.654 24.13,27.178 R20.1
NetR22_1: R22.1 U2.1 | length 3.3
  Top Layer w0.254: U2.1 19.834,26.159 20.571,26.159 v1(20.955,26.543)
  Bottom Layer w0.508: v1(20.955,26.543) 21.59,27.178 R22.1
NetR23_2: R23.2 R25.1 U3.2 | length 5.9
  Top Layer w0.508: U3.2 50.462,14.605 ccw(c50.462,15.113) 50.821,14.753 50.97,14.902 cw(c51.328,14.541) 51.328,15.05 R25.1@52.713,15.05 ; R23.2 52.959,15.05 R25.1
NetR24_2: R24.2 R27.1 U3.4 | length 7.2
  Top Layer w0.508: U3.4 48.717,17.17 48.641,17.17 cw(c48.641,17.678) 48.133,17.678 R27.1 48.133,20.709 48.379,20.955 R24.2
NetR28_1: R28.1 U3.6 | length 3.1
  Top Layer w0.508: R28.1 U3.6
PH: C6.1 L1.1 Q1.1 Q1.2 Q1.3 Q2.5 Q2.6 Q2.7 Q2.8 Q2.9 TP4.1 U1.14 | length 3.9
  Top Layer w0.254: U1.14 41.525,41.706 41.872,42.053
  Top Layer w0.508: 41.872,42.053 41.872,43.752 C6.1
SRN: C14.1 R7.2 TP8.1 U1.9 | length 11.7
  Top Layer w0.254: U1.9 43.09,37.855 43.794,37.855 44.11,37.54 44.121,37.54 44.664,36.997 44.928,36.997
  Top Layer w0.508: 44.928,36.997 46.146,36.997 cw(c46.146,36.489) 46.451,36.895 cw(c46.146,36.489) 46.506,36.848 48.04,35.314 48.484,35.068 48.73,34.822 48.86,34.692 ccw(c49.219,35.052) 49.219,34.544 R7.2 ; TP8.1 48.895,34.798 C14.1
SRP: C9.2 C12.2 C13.2 C14.2 L1.2 R6.2 TP7.1 U1.10 | length 23
  Top Layer w0.254: U1.10 43.938,38.358 44.299,37.997 45.085,37.997
  Top Layer w0.381: 45.085,37.997 47.485,37.997 cw(c47.485,37.616) 47.754,37.885 47.976,37.663 48.286,37.354 50.935,37.354 51.181,37.108 C12.2 51.181,36.886 51.529,36.538 51.727,36.538 52.362,35.903 ccw(c52.577,36.119) 52.577,35.814 60.326,35.814 ccw(c60.326,36.119) 60.541,35.903 60.582,35.944 ccw(c60.366,36.159) 60.67,36.159 60.67,38.775 61.418,39.522 R6.2
TERM_EN: R5.2 TP2.1 U1.6 U1.7 | length 10.7
  Top Layer w0.254: U1.6 U1.7
  Top Layer w0.305: 36.83,32.893 37.211,32.893 TP2.1
  Top Layer w0.635: R5.2 36.83,32.893 ; 37.211,32.893 40.129,32.893 40.13,32.893 ccw(c40.13,34.038) 41.275,34.037 41.275,36.83
V_IN: C17.2 H1.1 JDC1.1 Q3.5 Q3.6 Q3.7 Q3.8 R1.1 R2.1 R17.1 R21.2 | length 53.8
  Top Layer w0.508: R21.2 13.418,42.545 cw(c13.418,43.053) 13.06,42.693 10.689,45.064 cw(c11.049,45.422) 10.643,45.118 cw(c11.049,45.422) 10.541,45.422 10.541,50.209 cw(c11.049,50.209) 10.643,50.513 cw(c11.049,50.209) 10.689,50.567 13.739,53.617 cw(c14.097,53.257) 14.097,53.765 16.173,53.765 JDC1.1
  Top Layer w1.016: JDC1.1 17.907,53.594 Q3.5@26.289,53.594 ; Q3.5 26.26,53.593 26.164,55.506 cw(c27.433,55.568) 26.393,56.297 27.067,57.259 27.432,57.874 27.432,60.706 cw(c28.702,60.706) 28.702,61.976 ; 37.954,61.976 cw(c37.954,60.706) 37.966,61.976 38.937,61.967 R1.1 R2.1
  Top Layer w1.27: 28.702,61.976 37.954,61.976
V_IN_MOS: C1.2 C2.2 C3.2 P4.1 P4.2 Q1.5 Q1.6 Q1.7 Q1.8 Q1.9 Q3.1 Q3.2 Q3.3 R3.1 R4.1 R8.1 | length 74.2
  Top Layer w0.508: C3.2@33.579,49.098 C3.2@33.769,48.908
  Top Layer w1.27: C3.2@33.769,48.971 33.769,49.162 33.833,49.225 34.874,49.225 36.83,51.181 v2(36.83,58.166)
  Bottom Layer w1.27: v2(36.83,58.166) cw(c38.061,57.855) 37.162,58.752 40.268,61.858 cw(c41.166,60.96) 41.166,62.23 82.659,62.23 cw(c82.659,60.96) 83.556,61.859 84.465,60.95 cw(c83.566,60.053) 84.836,60.053 84.836,54.626 ccw(c86.106,54.628) 85.206,53.732 86.498,52.44 ccw(c87.394,53.34) 87.392,52.07 P4.2 P4.1
V_LOAD: C19.2 J1.1 P1.1 P1.2 R11.1 R23.1 U2.9 U3.7 | length 31
  Top Layer w0.254: U2.9 26.954,25.646 cw(c26.954,25.392) 27.133,25.572 28.321,24.384 R11.1
  Top Layer w0.508: P1.1 P1.2 ; C19.2 41.917,13.64 42.416,14.138 42.416,14.196 42.824,14.605 U3.7 ; v1(53.086,11.684) 54.737,11.684 ccw(c54.737,12.192) 55.245,12.192 R23.1
  Bottom Layer w0.508: P1.1 51.733,9.652 ccw(c51.733,10.16) 52.037,9.754 ccw(c51.733,10.16) 52.091,9.8 52.938,10.647 ccw(c52.578,11.005) 53.086,11.005 v1(53.086,11.684)
V_O_FUSE: F1.2 R11.2 U2.8 U2.10 | length 9.4
  Top Layer w0.254: U2.8 23.513,25.149 23.114,25.149 cw(c23.114,25.403) 22.86,25.403 22.86,25.867 cw(c23.114,25.867) 23.108,26.121 23.59,26.133 U2.10 26.93,26.146 ccw(c26.93,26.4) 27.082,26.197 ccw(c26.93,26.4) 27.109,26.22 28.247,27.358 ccw(c28.067,27.537) 28.27,27.385 ccw(c28.067,27.537) 28.321,27.537 R11.2
V_OUT: C7.1 C8.1 C11.2 F1.1 H2.1 P5.1 P5.3 R6.1 R7.1 R10.1 TP1.1 | length 12
  Top Layer w0.508: R7.1 53.713,34.342 53.808,34.313 ccw(c53.958,34.798) 53.958,34.29 61.343,34.29 cw(c61.341,33.782) 61.849,33.782 61.849,33.768 R6.1
  Top Layer w0.635: R10.1 C11.2
WDT_PWM: J_S2.1
WDT_RESET: J_S2.3 R18.2 U2.3 | length 15.6
  Top Layer w0.254: v1(13.716,26.416) 14.986,25.146 18.542,25.146 ; R18.2 18.915,28.321 18.542,27.948 18.542,25.146 ; U2.3 18.542,25.146
  Bottom Layer w0.254: J_S2.3 12.446,27.686 v1(13.716,26.416)
pads on no net: LED1.2 VIT1.1 VIT2.1 VIT3.1 VIT4.1

## Polygon pours and split planes (outlines as drawn)
WDT_RESET on Top Layer "NONET_L01_P-001" (solid, pour order 35): 17.399,25.019 17.399,25.273 17.6,25.273 ccw(c17.6,26.013) 18.124,25.49 18.307,25.673 ccw(c18.046,25.934) 18.415,25.934 18.415,26.547 18.669,26.547 18.669,25.654 19.05,25.273 19.558,25.273 19.558,25.019
V_O_FUSE on Top Layer "NONET_L01_P-001" (solid, pour order 34): 33.02,31.115 33.02,26.416 30.988,26.416 26.416,26.416 26.416,31.115
V_OUT on Top Layer "NONET_L01_P-001" (solid, pour order 9): 72.142,36.836 ccw(c70.012,38.967) 73.025,38.967 73.025,62.484 77.851,62.484 77.851,35.11 cw(c70.046,35.11) 75.565,29.591 cw(c69.74,35.416) 69.739,27.178 59.773,27.178 ccw(c59.773,23.298) 57.029,26.041 55.985,24.997 cw(c53.892,27.091) 53.034,24.257 34.417,24.257 34.417,31.115 35.477,31.115 cw(c35.477,26.315) 38.871,29.709 40.265,28.315 ccw(c42.703,30.752) 42.703,27.305 50.673,27.305 ccw(c50.673,28.956) 52.324,28.956 52.324,33.02 58.674,33.02 ccw(c58.674,33.528) 59.182,33.528 ccw(c58.674,33.528) 58.674,34.036 57.912,34.036 57.912,34.544 58.674,34.544 ccw(c58.674,35.052) 59.182,35.052 cw(c59.436,35.052) 59.436,35.306 68.448,35.306 ccw(c68.448,40.531)
V_LOAD on Top Layer "NONET_L01_P-001" (solid, pour order 19): 24.892,21.463 24.892,16.51 26.924,16.51 26.924,14.732 ccw(c29.591,14.732) 29.591,12.065 43.18,12.065 43.18,14.859 37.124,14.859 cw(c37.124,21.7) 32.286,16.863 31.564,17.585 cw(c33.874,19.895) 30.607,19.895 30.607,23.241 26.67,23.241 ccw(c26.67,21.463)
5V_LDO on Top Layer "NONET_L01_P-001" (solid, pour order 17): 10.541,15.367 8.255,15.367 8.255,14.097 10.414,14.097 cw(c10.414,12.827) 11.684,12.827 11.684,1.778 18.288,1.778 18.288,13.716 26.162,13.716 26.162,16.002 18.288,16.002 18.288,18.288 16.212,18.288 ccw(c16.212,14.407) 13.468,17.151 12.492,16.175 cw(c10.541,18.126)
GND on Top Layer "NONET_L01_P-001" (solid, pour order 18): 26.162,7.366 31.877,7.366 31.877,1.778 22.86,1.778 22.86,4.572 21.971,5.461 19.05,5.461 19.05,12.954 26.162,12.954
NetC21_2 on Top Layer "NONET_L01_P-001" (solid, pour order 33): 22.86,20.955 21.082,20.955 21.082,18.288 19.177,18.288 19.177,16.51 24.384,16.51 24.384,19.431 ccw(c22.86,19.431)
3V3 on Top Layer "NONET_L01_P-001" (solid, pour order 14): 76.596,17.541 77.163,18.108 cw(c77.904,17.368) 77.904,18.415 79.375,18.415 ccw(c79.375,20.701) 81.661,20.701 81.661,26.924 80.391,26.924 80.391,25.812 cw(c77.251,25.812) 79.471,23.591 78.644,22.764 cw(c75.81,25.598) 75.81,21.59 71.628,21.59 71.628,11.176 70.104,9.652 66.548,9.652 65.786,10.414 64.008,10.414 64.008,8.128 65.755,8.128 cw(c65.755,7.441) 66.241,7.927 ccw(c66.982,8.667) 66.982,7.62 69.596,7.62 cw(c69.596,6.394) 70.463,7.261 71.089,6.635 ccw(c72.39,7.936) 72.39,6.096 75.946,6.096 75.946,15.971 cw(c78.167,15.971)
NetC15_1 on Top Layer "NONET_L01_P-001" (solid, pour order 4): 42.38,35.903 42.202,35.725 cw(c41.068,34.591) 42.672,34.591 42.672,33.327 cw(c41.932,33.327) 42.455,32.803 42.037,32.385 40.64,32.385 40.64,30.988 47.498,30.988 47.498,33.528 45.06,33.528 cw(c45.06,34.138) 44.45,34.138 44.45,34.722 ccw(c43.667,34.722) 43.667,35.505 43.34,35.505 cw(c43.34,36.863)
NetC25_2 on Top Layer "NONET_L01_P-001" (solid, pour order 32): 70.104,6.477 70.216,6.365 cw(c68.952,5.102) 70.739,5.102 70.739,4.064 cw(c69.977,4.064) 69.977,3.302 65.024,3.302 cw(c65.024,3.937) 64.389,3.937 64.389,5.334 65.913,5.334 66.675,6.096 66.675,7.112 68.571,7.112 cw(c68.571,4.944)
5V_PS on Top Layer "NONET_L01_P-001" (solid, pour order 16): 60.118,6.61 63.23,3.497 ccw(c64.621,4.889) 64.621,2.921 74.925,2.921 ccw(c74.925,10.292) 80.137,5.08 80.834,5.777 ccw(c74.544,12.067) 83.439,12.067 83.439,22.733 84.709,22.733 84.709,6.53 cw(c81.209,6.53) 83.684,4.055 82.804,3.175 cw(c79.125,6.854) 79.125,1.651 61.192,1.651 cw(c61.192,3.745) 59.712,2.264 59.414,2.562 ccw(c57.627,0.775) 57.627,3.302 53.086,3.302 53.086,10.795 56.642,10.795 56.642,14.732 58.674,14.732 58.674,10.095 ccw(c63.603,10.095)
5V_PS on Top Layer "NONET_L01_P-001" (solid, remove dead copper, pour order 22): 84.709,23.718 84.709,22.733 83.439,22.733 83.439,26.819 cw(c85.533,26.819) 84.052,28.299 86.106,30.353 88.138,30.353 88.138,26.819 87.534,26.819 ccw(c87.534,24.344) 85.784,26.094 85.629,25.939 ccw(c87.849,23.718)
V_IN on Top Layer "NONET_L01_P-001" (solid, pour order 27): 41.91,62.611 34.036,62.611 34.036,61.341 35.582,61.341 cw(c35.582,59.861) 36.629,60.907 37.053,60.483 cw(c34.526,57.956) 38.1,57.956 38.1,54.61 41.91,54.61
V_IN on Top Layer "NONET_L01_P-001" (solid, pour order 0): 30.607,61.341 33.02,61.341 33.02,62.611 24.892,62.611 24.892,59.944 23.25,58.302 cw(c18.629,62.923) 18.629,56.388 13.97,56.388 13.97,51.054 27.686,51.054 27.686,53.743 cw(c29.166,53.743) 28.12,54.79 29.105,55.775 ccw(c27.624,57.255) 29.718,57.255 29.718,60.452 cw(c30.607,60.452)
PH on Top Layer "NONET_L01_P-001" (solid, pour order 5): 54.895,46.767 55.595,47.467 cw(c58.122,44.94) 58.376,48.505 58.376,62.484 52.324,62.484 52.324,52.578 50.546,50.8 44.928,50.8 44.928,50.038 42.418,50.038 42.418,45.466 42.164,45.212 41.656,45.212 41.656,43.434 43.732,43.434 ccw(c43.732,46.395) 45.825,44.301 46.631,45.107 cw(c48.111,43.627) 48.111,45.72 52.368,45.72 ccw(c52.368,49.294)
GND on Top Layer "NONET_L01_P-001" (solid, pour order 26): 58.376,46.99 58.376,36.576 53.086,36.576 52.832,36.83 52.832,40.386 54.356,41.91 54.356,42.97 cw(c57.93,42.97) 55.403,45.497 55.849,45.943 cw(c58.376,43.416)
GND on Top Layer "NONET_L01_P-001" (solid, pour order 29): 51.308,54.168 51.308,51.374 46.736,51.374 46.736,54.168
NetC4_2 on Top Layer "NONET_L01_P-001" (solid, pour order 28): 43.688,62.484 51.054,62.484 51.054,54.61 43.688,54.61
GND on Top Layer "NONET_L01_P-001" (solid, pour order 11): 28.702,51.054 28.702,52.114 cw(c32.276,52.114) 29.749,54.641 30.099,54.991 ccw(c27.953,57.137) 30.988,57.137 30.988,59.69 cw(c32.004,59.69) 32.004,60.706 33.02,60.706 cw(c33.02,58.928) 34.798,58.928 34.798,51.054
SRP on Top Layer "NONET_L01_P-001" (solid, pour order 25): 59.69,38.1 59.69,62.484 70.612,62.484 70.612,40.255 cw(c68.457,40.255) 68.457,38.1
5V_LDO on Top Layer "NONET_L01_P-001" (solid, pour order 24): 9.398,31.242 9.398,29.337 7.62,29.337 6.985,28.702 6.985,27.051 5.216,27.051 ccw(c5.216,25.496) 4.117,26.596 ccw(c5.163,25.549) 3.683,25.549 3.683,23.368 2.54,23.368 2.413,23.241 2.413,25.496 cw(c5.247,25.496) 3.243,27.5 6.985,31.242
3V3 on Top Layer "NONET_L01_P-001" (solid, pour order 23): 87.433,36.322 ccw(c87.433,34.039) 85.818,35.653 81.311,31.146 ccw(c83.531,28.925) 80.391,28.925 80.391,26.924 81.661,26.924 cw(c85.647,26.924) 82.828,29.742 84.08,30.994 cw(c87.131,27.944) 87.131,32.258 ccw(c87.131,33.265) 88.138,33.265 88.138,35.617 ccw(c87.433,35.617)
GND on Top Layer "NONET_L01_P-001" (solid, pour order 15): 56.134,14.351 56.134,15.494 59.69,15.494 59.69,12.7 ccw(c61.722,12.7) 60.738,10.922 66.04,10.922 66.802,10.16 69.342,10.16 70.866,11.684 70.866,17.78 67.818,17.78 66.548,19.05 66.548,26.035 58.801,26.035 58.801,19.177 54.102,19.177 54.102,14.351
NetC1_1 on Top Layer "NONET_L01_P-001" (solid, pour order 13): 16.51,46.228 16.51,50.292 12.192,50.292 12.192,47.244 14.732,47.244 14.732,46.228
V_IN on Top Layer "NONET_L01_P-001" (solid, pour order 12): 21.082,41.402 21.082,44.196 13.208,44.196 13.208,41.402
V_IN_MOS on Top Layer "NONET_L01_P-001" (solid, pour order 10): 26.797,45.847 ccw(c26.797,47.244) 28.194,47.244 28.194,50.292 33.826,50.292 ccw(c33.826,53.253) 35.919,51.159 cw(c38.118,48.961) 38.118,52.07 41.91,52.07 41.91,46.482 cw(c41.148,46.482) 41.148,45.72 40.07,45.72 ccw(c40.07,40.35) 36.273,44.147 35.152,43.026 cw(c31.232,46.946) 31.231,41.402 24.384,41.402 24.384,44.704 16.764,44.704 16.764,50.292 25.4,50.292 25.4,47.244 ccw(c26.797,47.244)
MPPSET on Top Layer "NONET_L01_P-001" (solid, pour order 8): 22.606,38.354 22.203,38.354 ccw(c22.203,36.874) 20.724,36.83 16.256,36.83 16.256,40.894 20.828,40.894 21.082,40.64 21.082,39.779 ccw(c21.904,39.779) 21.54,39.041 ccw(c22.308,40.596) 22.308,38.862 22.606,38.862 21.59,38.862 22.606,38.862
NetC16_2 on Top Layer "NONET_L01_P-001" (solid, pour order 2): 47.603,13.059 ccw(c49.083,11.579) 46.99,11.579 46.99,9.144 43.688,9.144 43.688,3.302 51.816,3.302 51.816,12.446 ccw(c50.546,12.446) 50.546,13.716 49.189,13.716 ccw(c49.189,11.474)
GND on Top Layer "NONET_L01_P-001" (solid, pour order 1): 46.736,23.495 46.736,18.034 48.26,16.51 48.26,13.716 45.72,13.716 45.72,16.51 43.18,16.51 42.672,17.018 37.973,17.018 37.973,23.495
no net on Bottom Solder "NONET_L01_P-001" (solid): 43.942,18.32 43.942,11.398 49.784,11.398 49.784,18.32
no net on Bottom Solder "NONET_L01_P-001" (solid, pour order 6): 34.036,54.356 34.036,34.544 52.578,34.544 52.578,54.356
GND on Bottom Layer "NONET_L01_P-001" (solid, remove dead copper, pour order 30): 0,0 94.361,0 94.361,63.627 0,63.627

## Keep-outs
Keep-Out Layer:
  lines w0.5: 0,0 94.361,0 ; 0,0 0,63.754 ; 0,0 0,63.754 ; 0,63.754 94.361,63.754 ; 0,63.754 94.361,63.754 ; 94.361,0 94.361,63.754 ; 94.361,0 94.361,63.754

## Silkscreen, mask and mechanical layers (free items; w line width, h text height)
Top Overlay:
  drawing of 41 lines, arcs and shapes, not listed
  text "+" at 26.924,54.864 h1.52
  text "-" at 32.004,54.864 h1.52
  text "+" at 74.93,54.864 h1.52
  text "-" at 80.01,54.864 h1.52
  text "Design by LDH /   29012026" at 73.406,51.562 h0.64 r180
  text "Ver5.0.1" at 73.406,50.305 h1.4 r180
  text "POWER MODULE" at 84.177,50.294 h1.4 r180
  text "IN-" at 37.592,24.13 h1.27 r180
  text "OUT+" at 62.23,24.13 h1.27 r180
  text "IN+" at 37.592,10.414 h1.27 r180
  text "OUT+" at 62.23,10.414 h1.27 r180
Bottom Overlay:
  text "VIN" at 28.829,56.134 h1.02 r180
  text "VOUT" at 76.243,56.134 h1.02 r180
  text "VIN" at 83.313,52.578 h1.02 r180
  text "DCIN" at 14.479,52.07 h1.02 r180
  text "-5V" at 83.144,50.038 h1.02 r180
  text "GND" at 83.144,47.498 h1.02 r180
  text "GND" at 2.668,35.611 h0.76 r180
  text "SDA" at 10.439,35.611 h0.76 r180
  text "3V3" at 83.744,35.611 h0.76 r180
  text "GND" at 91.008,35.611 h0.76 r180
  text "GND" at 2.668,33.071 h0.76 r180
  text "SCL" at 10.439,33.071 h0.76 r180
  text "3V3" at 83.744,33.071 h0.76 r180
  text "GND" at 91.008,33.071 h0.76 r180
  text "GND" at 91.008,30.531 h0.76 r180
  text "+5V_L" at 1.144,30.404 h0.76 r180
  text "+5V_L" at 10.439,30.404 h0.76 r180
  text "+5V_S" at 82.221,30.404 h0.76 r180
  text "BATT+" at 72.603,28.829 h1.02 r180
  text "RST" at 10.439,27.991 h0.76 r180
  text "GND" at 91.008,27.991 h0.76 r180
  text "+5V_L" at 1.144,27.864 h0.76 r180
  text "+5V_S" at 82.221,27.864 h0.76 r180
  text "BATT-" at 72.603,26.289 h1.02 r180
  text "3V3" at 2.668,25.451 h0.76 r180
  text "PWM" at 10.439,25.451 h0.76 r180
  text "-5V" at 83.744,25.451 h0.76 r180
  text "GND" at 91.008,25.451 h0.76 r180
Bottom Solder:
  pour cut-out: 44.577,53.34 44.577,44.45 42.799,42.672 39.878,42.672 39.878,44.45 39.37,44.958 38.989,44.958 38.481,44.45 38.481,41.148 45.72,41.148 47.498,42.926 45.847,44.577 45.847,53.34

## Text inside footprints (layer, text, board x,y; h text height)
J_S1: Top Overlay "1" at 90.539,22.371 h1.02 r90; Top Overlay "2" at 87.503,21.717 h1.02 r90; Top Overlay "9" at 90.399,36.855 h1.02 r90; Top Overlay "10" at 87.986,36.728 h1.02 r90
J_S2: Top Overlay "10" at 6.909,36.728 h1.02 r90; Top Overlay "9" at 9.322,36.855 h1.02 r90; Top Overlay "2" at 6.426,21.717 h1.02 r90; Top Overlay "1" at 9.462,22.371 h1.02 r90
P4: Bottom Overlay "1" at 90.678,54.102 h1.27 r90; Bottom Overlay "2" at 88.138,54.61 h1.27 r90; Bottom Overlay "5" at 90.678,45.466 h1.27 r90; Bottom Overlay "6" at 88.138,45.466 h1.27 r90